# EAGLE board hurf1_board (EAGLE 8.2.2)
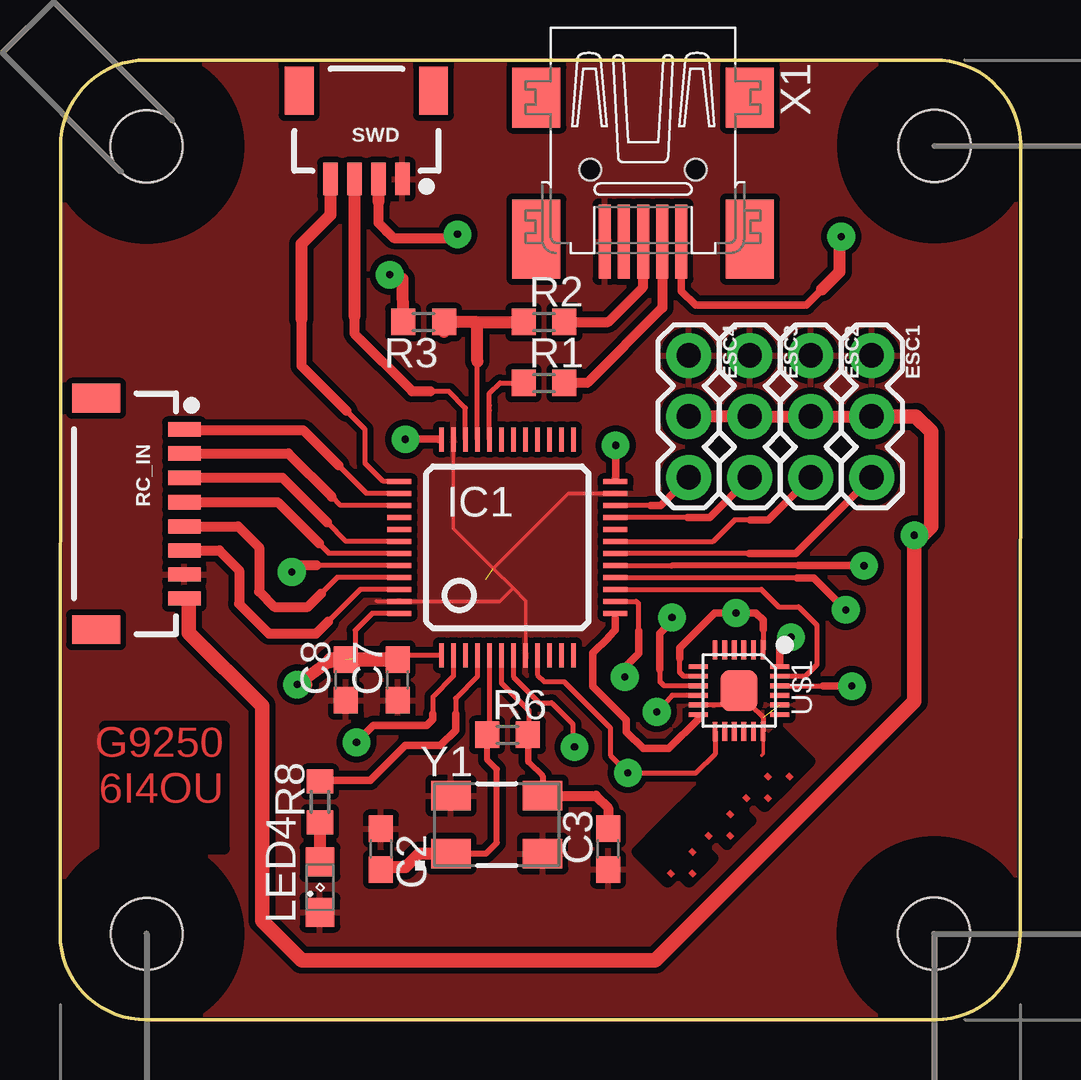
[diagram p0: board, top side]
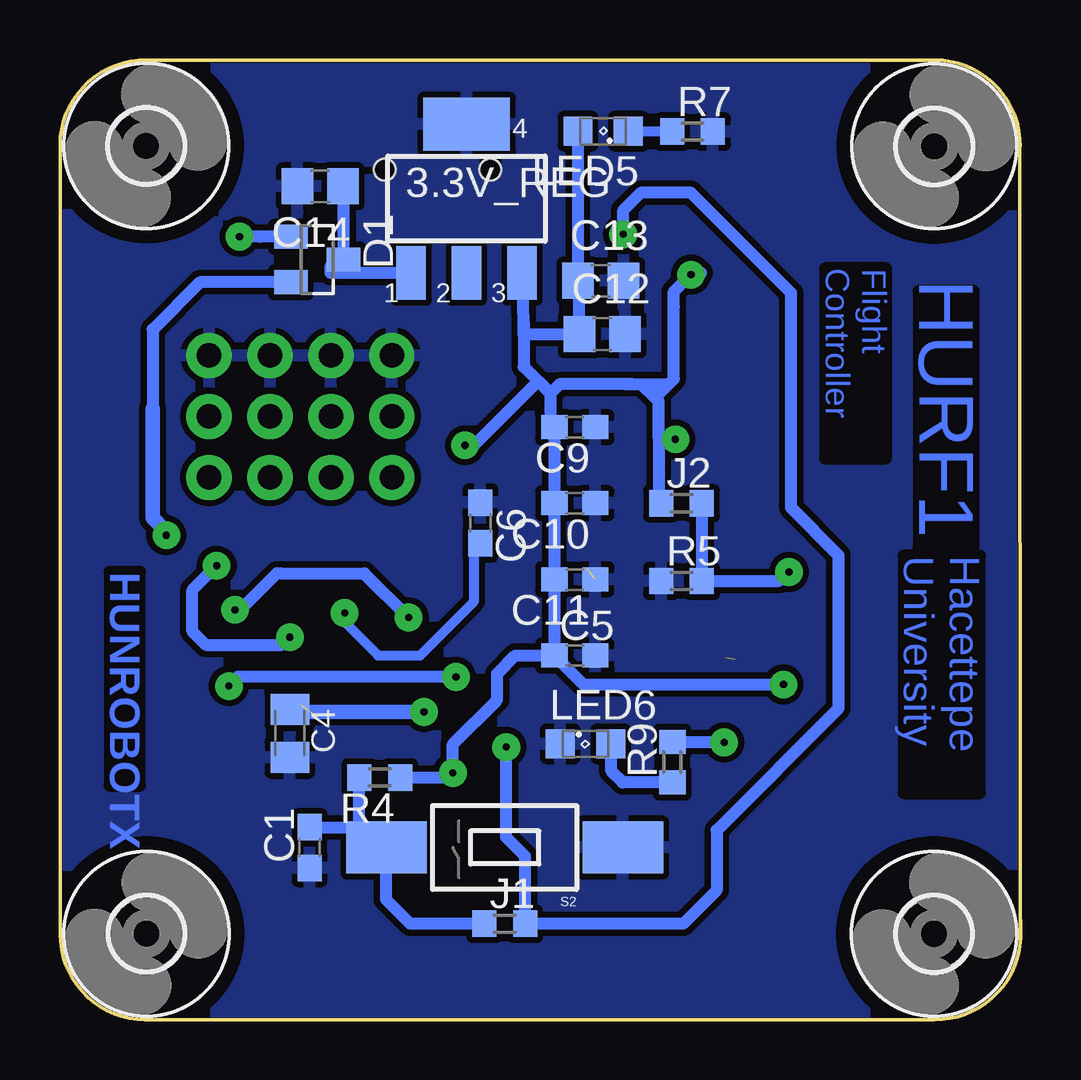
[diagram p1: board, bottom side, seen from below]

Size 40.03 x 40.01 mm. Coordinates in mm from the lower left corner, seen from the top.
Outline: 0.01,3.33 0.04,36.45
Outline: 40.01,3.46 40.03,36.64
Outline: 36.48,0 36.48,0.01 36.47,0.01
Outline: 36.47,0.01 3.61,0.01 arc-90 0,3.56
Outline: 0,3.38 0,4.15
Outline: 40.01,3.59 arc-90 36.47,0.01
Outline: 40.03,36.46 arc90 36.42,40.01 3.58,40.01 arc90 0.03,36.4
Copper layers (1*16): Top 0.035mm / dielectric 1.5mm / Bottom 0.035mm
Design rules "default *": minimum track width 6mil, minimum drill 0.35mm, track to track 10mil, track to pad 10mil, pad to pad 6mil, via to via 6mil, smd to smd 6mil, copper to edge 1mil, drill to drill 1mil, minimum pad ring 10mil, minimum via ring 8mil, stop-mask expansion 4mil, vias tented up to drill 0mil, thermal gap 10mil

## Footprints (pad centres in the part's own frame; a part is rotated, then mirrored left to right if it is on the bottom)
SOT223 = smd 1.219 x 2.235: 1 -2.311,-3.099; 2 0,-3.099; 3 2.311,-3.099 | smd 3.6 x 2.2: 4 0,3.099
C0603 = smd 1.1 x 1: 1 -0.85,0; 2 0.85,0
C0805K = smd 1.3 x 1.6: 1 -1,0; 2 1,0
C0805 = smd 1.3 x 1.5: 1 -0.95,0; 2 0.95,0
SOT23 = smd 1 x 1.4: 1 -0.95,-1.1; 2 0.95,-1.1; 3 0,1.1
1X03 = drill 1.016 pad 1.88: 1 0,0; 2 2.54,0; 3 5.08,0
3,0 = hole 3: 0,0
TQFP48 = smd 0.2 x 1: 1 -2.75,-4.5; 2 -2.25,-4.5; 3 -1.75,-4.5; 4 -1.25,-4.5; 5 -0.75,-4.5; 6 -0.25,-4.5; 7 0.25,-4.5; 8 0.75,-4.5; 9 1.25,-4.5; 10 1.75,-4.5; 11 2.25,-4.5; 12 2.75,-4.5; 25 2.75,4.5; 26 2.25,4.5; 27 1.75,4.5; 28 1.25,4.5; 29 0.75,4.5; 30 0.25,4.5; 31 -0.25,4.5; 32 -0.75,4.5; 33 -1.25,4.5; 34 -1.75,4.5; 35 -2.25,4.5; 36 -2.75,4.5 | smd 1 x 0.2: 13 4.5,-2.75; 14 4.5,-2.25; 15 4.5,-1.75; 16 4.5,-1.25; 17 4.5,-0.75; 18 4.5,-0.25; 19 4.5,0.25; 20 4.5,0.75; 21 4.5,1.25; 22 4.5,1.75; 23 4.5,2.25; 24 4.5,2.75; 37 -4.5,2.75; 38 -4.5,2.25; 39 -4.5,1.75; 40 -4.5,1.25; 41 -4.5,0.75; 42 -4.5,0.25; 43 -4.5,-0.25; 44 -4.5,-0.75; 45 -4.5,-1.25; 46 -4.5,-1.75; 47 -4.5,-2.25; 48 -4.5,-2.75
R0603 = smd 1 x 1.1: 1 -0.85,0; 2 0.85,0
SML0805 = smd 1.2 x 1.2: A 1.05,0; C -1.05,0
1X08_1MM_RA = smd 0.6 x 1.35: 1 -5.048,0; 2 -4.048,0; 3 -3.032,0; 4 -2.016,0; 5 -1,0; 6 0,0; 7 1,0; 8 2,0 | smd 1.2 x 2: NC1 3.3,-3.675; NC2 -6.348,-3.675
TL3302_GULL_WING = smd 3.35 x 2.16: 1 -4.925,0; 2 4.925,0
1X04_1MM_RA = smd 0.6 x 1.35: 1 -1.5,0; 2 -0.5,0; 3 0.5,0; 4 1.5,0 | smd 1.2 x 2: NC1 2.8,-3.675; NC2 -2.8,-3.675
LEAD-QFN24 = smd 0.8 x 0.2: 1 -1.7,1; 2 -1.7,0.6; 3 -1.7,0.2; 4 -1.7,-0.2; 5 -1.7,-0.6; 6 -1.7,-1; 13 1.7,-1; 14 1.7,-0.6; 15 1.7,-0.2; 16 1.7,0.2; 17 1.7,0.6; 18 1.7,1 | smd 0.2 x 0.8: 7 -1,-1.7; 8 -0.6,-1.7; 9 -0.2,-1.7; 10 0.2,-1.7; 11 0.6,-1.7; 12 1,-1.7; 19 1,1.7; 20 0.6,1.7; 21 0.2,1.7; 22 -0.2,1.7; 23 -0.6,1.7; 24 -1,1.7 | smd 1.7 x 1.54: 25 0,0
32005-201 = smd 3.1 x 0.5: 1 3,1.6; 2 3,0.8; 3 3,0; 4 3,-0.8; 5 3,-1.6 | smd 2.5 x 2: M1 -3,-4.45; M2 -3,4.45 | smd 3.3 x 2: M3 2.9,4.45; M4 2.9,-4.45 | hole 0.9: 0,2.2; 0,-2.2
GSX-531 = smd 1.64 x 1.24: 1 -1.91,-1.21; 2 1.91,-1.21; 3 1.91,1.21; 4 -1.91,1.21

## Placement (x,y rotation side)
3.3V_REG  LM340MP-05  [SOT223]  23.09,34.23 0 bottom
C1  100nF  [C0603]  29.63,7.18 90 bottom
C2  18pF  [C0603]  13.37,7.12 270 top
C3  18pF  [C0603]  22.83,7.12 90 top
C4  100nF  [C0805K]  30.45,11.94 270 bottom
C5  100nF  [C0603]  18.58,15.18 0 bottom
C6  10nF  [C0603]  22.52,20.71 270 bottom
C7  100nF  [C0603]  14.07,14.17 90 top
C8  100nF  [C0603]  11.91,14.17 90 top
C9  100nF  [C0603]  18.58,24.71 180 bottom
C10  10nF  [C0603]  18.58,21.53 180 bottom
C11  1nF  [C0603]  18.58,18.36 180 bottom
C12  10uF  [C0805]  17.44,28.58 0 bottom
C13  10uF  [C0805]  17.5,30.8 0 bottom
C14  10uF  [C0805]  29.18,34.74 180 bottom
D1  [SOT23]  29.31,31.69 270 bottom
ESC1  [1X03]  33.82,27.69 270 top
ESC2  [1X03]  31.28,27.69 270 top
ESC3  [1X03]  28.74,27.69 270 top
ESC4  [1X03]  26.2,27.69 270 top
H1  MOUNT-HOLE3.0  [3,0]  36.42,3.59 0 bottom
H2  MOUNT-HOLE3.0  [3,0]  36.44,36.43 0 bottom
H3  MOUNT-HOLE3.0  [3,0]  3.61,3.59 0 bottom
H4  MOUNT-HOLE3.0  [3,0]  3.6,36.41 0 bottom
IC1  STM32F10XCXT6  [TQFP48]  18.64,19.69 0 top
J1  0R  [R0603]  21.5,4.01 0 bottom
J2  0R  [R0603]  14.14,21.53 0 bottom
LED4  [SML0805]  10.83,5.53 90 top
LED5  [SML0805]  17.4,37.04 180 bottom
LED6  [SML0805]  18.14,11.5 0 bottom
R1  22R  [R0603]  20.17,26.55 0 top
R2  22R  [R0603]  20.17,29.09 0 top
R3  1K  [R0603]  15.15,29.09 180 top
R4  100K  [R0603]  26.71,10.1 180 bottom
R5  10K  [R0603]  14.14,18.29 0 bottom
R6  1M  [R0603]  18.64,11.88 0 top
R7  330R  [R0603]  13.68,37.03 0 bottom
R8  330R  [R0603]  10.83,9.09 90 top
R9  330R  [R0603]  14.52,10.74 90 bottom
RC_IN  [1X08_1MM_RA]  5.18,19.56 270 top
S2  [TL3302_GULL_WING]  21.5,7.18 180 bottom
SWD  swd  [1X04_1MM_RA]  12.76,35.05 180 top
U$1  MPU-9250  [LEAD-QFN24]  28.3,13.72 270 top
X1  MINI-USB-32005-201  [32005-201]  24.3,35.44 270 top
Y1  8MHz  [GSX-531]  18.2,8.13 0 top

## Library data of the parts
3.3V_REG = linear
C1-C3 C5-C14 J1 J2 R1-R9 = rcl
C4 = resistor
D1 = diode
ESC1-ESC4 RC_IN = SparkFun-Connectors
H1-H4 = holes
IC1 = stm32
LED4-LED6 = led
S2 = eswitch-tact
SWD = SparkFun-Connectors; PROD_ID: CONN-10310; SF_ID: PRT-10208
U$1 = invensense
X1 = con-cypressindustries; OC_FARNELL: unknown; OC_NEWARK: unknown
Y1 = Golledge; HEIGHT: 0.9

## Nets
3.3V: 3.3V_REG.3 C5.1 C7.2 C8.2 C9.2 C10.2 C11.2 C12.1 C13.1 IC1.1 IC1.9 IC1.24 IC1.36 IC1.48 J2.1 LED5.A R3.2 R4.1 U$1.13
BOOT: IC1.44 J2.2 R5.2
ESC1: ESC1.3 IC1.18
ESC2: ESC2.3 IC1.19
ESC3: ESC3.3 IC1.21
ESC4: ESC4.3 IC1.22
GND: 3.3V_REG.4 C1.1 C2.1 C3.1 C4.2 C5.2 C6.1 C7.1 C8.1 C9.1 C10.1 C11.1 C12.2 C13.2 C14.2 ESC1.1 ESC2.1 ESC3.1 ESC4.1 IC1.8 IC1.23 IC1.35 IC1.47 LED4.C LED6.C R5.1 R7.2 RC_IN.7 S2.1 SWD.1 U$1.11 U$1.18 U$1.20 X1.5 Y1.2 Y1.4
MPU_INT: IC1.13 U$1.12
N$1: R1.2 X1.2
N$2: R2.2 X1.3
N$3: C4.1 U$1.10
N$4: 3.3V_REG.1 C14.1 D1.3
N$5: C1.2 J1.1 R4.2 S2.2
N$6: LED6.A R9.1
N$7: LED5.C R7.1
N$8: LED4.A R8.1
NRST: IC1.7 J1.2 SWD.2
OSC_IN: C2.2 IC1.5 R6.1 Y1.1
OSC_OUT: C3.2 IC1.6 R6.2 Y1.3
RC_IN1: IC1.46 RC_IN.6
RC_IN2: IC1.45 RC_IN.5
RC_IN3: IC1.43 RC_IN.4
RC_IN4: IC1.42 RC_IN.3
RC_IN5: IC1.39 RC_IN.2
RC_IN6: IC1.38 RC_IN.1
SPI1_MISO: IC1.16 U$1.9
SPI1_MOSI: IC1.17 U$1.24
SPI1_NSS: IC1.14 U$1.22
SPI1_SCK: IC1.15 U$1.23
STATUS_LED1: IC1.2 R9.2
STATUS_LED2: IC1.4 R8.2
SWDCLK: IC1.37 SWD.4
SWDIO: IC1.34 SWD.3
UNREG_5V: D1.2 ESC1.2 ESC2.2 ESC3.2 ESC4.2 RC_IN.8
USB_DM: IC1.32 R1.1
USB_DP: IC1.33 R2.1 R3.1
USB_ID: X1.4
USB_UNREG: D1.1 X1.1
VDDIO: C6.2 U$1.1 U$1.8

## Tracks (layer width: path | path; a pad name or v marks a point on that pad's centre or on a via)
3.3V  (via drill 0.3 pad 1.15)  (1 unrouted)
  Top 0.203: U$1.13 27.3,11.07 26.52,10.29 23.7,10.29 | 23.7,10.29 v23.66,10.29 22.93,11.02 22.93,12.17 20.99,14.1 20.17,14.1 19.89,14.38 IC1.9 | 23.66,10.33 23.7,10.29 | 15.79,24.19 IC1.36 | IC1.48 13,16.94 12.29,16.23 12.29,15.08 | IC1.24 23.14,22.57 23.14,24.26 | IC1.1 14.25,15.19 C7.2
  Top 0.305: v14.39,24.2 15.78,24.2 15.79,24.19 | v23.15,23.95 23.15,22.58 23.14,22.57
  Top 0.508: R3.2 14.28,30.88 v13.74,31.06 | 11.24,14.95 v9.88,13.98 10.27,13.96
  Top 0.61: C7.2 C8.2 11.3,15.02 11.24,14.95
  Bottom 0.305: C9.2 C10.2 C11.2 C5.1
  Bottom 0.406: v23.66,10.3 v23.66,10.29
  Bottom 0.508: C5.1 C9.2 19.6,24.72 19.6,26.1 | 15.23,25.93 15.79,26.49 16.17,26.49 | 15.23,25.93 15.09,25.78 15.09,24.28 | 16.47,26.5 16.17,26.49 | C5.1 18.22,13.98 v9.88,13.98 | 15.09,24.28 15.09,21.63 J2.1 | v14.39,24.2 15,24.2 15.09,24.28 | 14.45,29.73 14.45,26.71 14.67,26.49 | 16.17,26.49 19.21,26.49 19.6,26.1 | 20.71,29.09 3.3V_REG.3 | 20.71,29.09 20.71,27.22 20.11,26.62 | 20.11,26.62 19.6,26.1 | 20.71,29.09 20.71,28.58 C12.1 18.39,30.74 C13.1 LED5.A | v23.15,23.95 22.78,23.95 20.11,26.62 | R4.1 23.85,10.1 v23.66,10.3 | v23.66,10.29 23.66,11.5 21.82,13.34 21.82,14.42 21.06,15.18 C5.1 | 13.35,31.1 13.32,31.15 v13.74,31.06 14.45,30.35 14.45,29.73 | 16.17,26.49 14.67,26.49 | 15.23,25.93 14.67,26.49 | 14.46,29.53 14.45,29.73
BOOT  (via drill 0.3 pad 1.15)
  Top 0.203: IC1.44 10.69,18.94
  Top 0.406: v9.66,18.67 9.7,18.94 10.69,18.94
  Bottom 0.508: J2.2 R5.2 10.07,18.29 v9.66,18.67
ESC1
  Top 0.203: 28.72,19.44 IC1.18
  Top 0.305: ESC1.3 30.65,19.44 28.72,19.44
ESC2
  Top 0.203: IC1.19 27.21,19.94 28.1,20.83 28.76,20.83
  Top 0.305: ESC2.3 29.5,20.83 28.76,20.83
ESC3
  Top 0.203: 26.15,20.94 IC1.21
  Top 0.305: ESC3.3 27.07,20.94 26.15,20.94
ESC4
  Top 0.203: 24.61,21.44 IC1.22
  Top 0.305: ESC4.3 25.03,21.44 24.61,21.44
GND  (2 unrouted)
  Top 0.152: IC1.35 16.39,20.48 18.06,18.82 | 18.88,18 18.06,18.82 | 18.88,18 19.41,17.47 19.41,15.2 IC1.8 | 13.18,17.47 13.21,17.44 IC1.47 18.32,17.44 18.88,18 | IC1.23 21.18,21.94 18.06,18.82 | U$1.18 29.3,11.09 29.24,11.03
  Top 0.203: U$1.18 29.3,12.6 28.77,13.13 26.65,13.13 U$1.11
  pour Top: -13.11,-10.79 -13.11,50.17 -11.84,51.44 50.39,51.44 52.93,48.9 52.93,-9.52 51.66,-10.79 -11.84,-10.79
  pour Bottom: -12.34,50.68 48.11,50.68 50.9,47.89 50.9,-5.45 44.04,-12.31 -5.23,-12.31 -13.36,-4.18 -13.36,49.66
  pour Top (no thermals): 16.1,22.68 15.72,22.29 15.72,17.09 16.1,16.71 21.31,16.71 21.69,17.09 21.69,22.29 21.31,22.68
MPU_INT
  Top 0.203: IC1.13 23.14,16.75 | 26.58,12.71 U$1.12 26.6,12.61
  Top 0.305: 26.6,12.61 26.6,12.53 25.37,11.31 24.3,11.31 23.6,12.01 23.6,12.5 22.2,13.9 22.2,15.29 22.84,15.93 22.84,15.95 23.14,16.25 23.14,16.75
N$1
  Top 0.406: R1.2 21.96,26.55 25.1,29.68 X1.2
N$2
  Top 0.406: X1.3 24.3,30.55 22.83,29.09 R2.2
N$3  (via drill 0.3 pad 1.15)
  Top 0.203: U$1.10 25.5,13.53 v24.87,12.83
  Bottom 0.61: v24.87,12.83 30.34,12.83 C4.1
N$4
  Bottom 0.508: 3.3V_REG.1 28.75,31.13 28.74,31.44 28.17,31.27 D1.3 28.21,34 C14.1
N$5
  Bottom 0.508: J1.1 25.44,4.01 26.45,5.02 26.45,7.15 | 26.45,7.15 S2.2 | 27.56,8.04 R4.2 | 27.56,8.04 27.56,7.35 27.6,7.31 26.61,7.31 26.45,7.15 | C1.2 27.57,8.03 27.56,8.04
N$6
  Bottom 0.508: R9.1 16.59,9.89 17.06,10.36 17.06,11.47 LED6.A
N$7
  Bottom 0.406: LED5.C 14.54,37.04 R7.1
N$8
  Top 0.508: R8.1 LED4.A
N$20
  Bottom 0.001: 19.61,20.56 19.59,20.59 19.57,20.57
N$21
  Bottom 0.001: 19.67,20.63 19.66,20.65 19.63,20.63 19.61,20.61 19.65,20.56
N$23
  Bottom 0.001: 19.38,20.92 19.45,20.96 19.43,20.99
N$24
  Bottom 0.001: 19.5,20.8 19.49,20.79
NRST  (via drill 0.3 pad 1.15)
  Top 0.203: IC1.7 18.89,14.3 19.98,13.21 20.48,13.21 21.37,12.33 21.37,11.44 v21.44,11.37
  Top 0.406: 13.26,34.12 13.26,33.23 13.61,32.88 13.62,32.88 13.9,32.59 16.41,32.59 v16.56,32.75
  Top 0.508: SWD.2 13.26,34.12
  Bottom 0.508: v21.44,11.37 21.44,7.61 20.65,6.82 J1.2 14.07,4.01 12.67,5.4 12.67,7.9 7.59,12.98 7.59,19.37 9.57,21.35 9.57,30.3 13.74,34.47 15.83,34.47 16.56,33.75 v16.56,32.75
OSC_IN
  Top 0.152: 17.89,12.08 IC1.5 | 17.89,12.08 17.89,11.92 17.89,11.76 17.89,11.64 R6.1 | 17.82,12.01 17.89,12.08
  Top 0.203: R6.1 17.79,10.84 | IC1.5 17.89,11.76
  Top 0.254: 17.89,11.92 17.79,11.82 17.79,10.84 18.2,10.44 18.2,7.38 17.74,6.92 Y1.1 16.27,7.09
  Top 0.508: Y1.1 14.96,6.92 14.39,6.36 13.46,6.36 C2.2
OSC_OUT
  Top 0.152: 19.53,12.9 19.53,11.91 19.53,11.87 19.53,11.5 R6.2
  Top 0.203: 19.53,11.91 19.53,11.87 | 19.53,11.87 19.53,10.74 | IC1.6 18.39,14.04 19.53,12.9 19.53,11.87
  Top 0.254: R6.2 19.49,10.78 19.53,10.74 20.11,10.16 Y1.3
  Top 0.406: Y1.3 22.32,9.34 22.83,8.83 C3.2
RC_IN1
  Top 0.203: IC1.46 12.51,17.94 11.16,16.59
  Top 0.406: 11.16,16.59 10.66,16.09 8.72,16.09 7.47,17.34 7.47,18.74 6.64,19.56 RC_IN.6
RC_IN2
  Top 0.2: IC1.45 11.55,18.44 11.28,18.17
  Top 0.203: 11.28,18.17 10.88,17.77
  Top 0.406: RC_IN.5 7.42,20.56 8.29,19.69 8.29,17.85 8.93,17.21 10.32,17.21 10.88,17.77
RC_IN3
  Top 0.2: IC1.43 11.21,19.44 10.8,19.86
  Top 0.406: RC_IN.4 9.07,21.58 10.8,19.86
RC_IN4
  Top 0.2: IC1.42 11.92,19.94 11.12,20.74
  Top 0.406: RC_IN.3 9.26,22.6 11.12,20.74
RC_IN5
  Top 0.2: IC1.39 11.69,21.44 11.32,21.81
  Top 0.406: RC_IN.2 9.52,23.61 11.32,21.81
RC_IN6
  Top 0.2: IC1.38 12.77,21.94 11.6,23.12
  Top 0.406: RC_IN.1 5.21,24.58 10.13,24.58 11.6,23.12
SPI1_MISO  (via drill 0.3 pad 1.15)
  Top 0.203: 24.99,14.6 24.99,14.1 25.17,13.92 U$1.9 | IC1.16 30.69,18.44 30.71,18.42
  Top 0.305: 30.71,18.42 31.41,18.42 v32.74,17.09 | v25.5,16.77 25.5,16.61 24.99,16.1 24.99,14.6
  Bottom 0.305: 30.99,18.61 30.84,18.61
  Bottom 0.508: v32.74,17.09 32.52,17.09 30.99,18.61 | 30.84,18.61 27.34,18.61 v25.5,16.77
SPI1_MOSI  (via drill 0.3 pad 1.15)
  Top 0.203: 30,14.83 U$1.24 | IC1.17 25.47,18.94 25.49,18.93
  Top 0.254: 30.76,18.93 25.49,18.93
  Top 0.305: v30.45,15.94 30,15.49 30,14.83 | v33.5,18.93 30.76,18.93
  Bottom 0.508: v33.5,18.93 34.52,17.91 34.52,16.2 33.95,15.63 30.77,15.63 v30.45,15.94
SPI1_NSS  (via drill 0.3 pad 1.15)
  Top 0.203: U$1.22 31.8,13.92 | IC1.14 24.01,17.44 24.1,17.34 24.1,16.21
  Top 0.305: v23.53,14.29 23.53,14.7 24.1,15.27 24.1,16.21 | 31.8,13.92 v32.98,13.92 v32.99,13.91
  Bottom 0.508: v23.53,14.29 32.61,14.29 v32.99,13.91
SPI1_SCK
  Top 0.152: 31.07,14.34 31.05,14.32
  Top 0.203: IC1.15 29.22,17.94 29.95,17.21 30.77,17.21 31.53,16.45 31.53,14.8 31.07,14.34 | 31.05,14.32 U$1.23
STATUS_LED1  (via drill 0.3 pad 1.15)
  Top 0.203: IC1.2 16.39,14.33 15.53,13.47 15.53,12.76
  Top 0.305: 15.53,12.76 15.53,12.52 15.28,12.26 13.06,12.26 v12.36,11.56
  Bottom 0.508: R9.2 12.38,11.59 v12.36,11.56
STATUS_LED2
  Top 0.203: IC1.4 17.39,14.31 16.48,13.4 16.48,12.76
  Top 0.305: 16.48,12.76 16.48,12.07 15.85,11.44 14.39,11.44 12.93,9.98 10.87,9.98 R8.2
SWDCLK
  Top 0.203: IC1.37 13.47,22.44 12.7,23.21 12.7,24.63 11.95,25.38
  Top 0.406: 10.06,29.22 10.06,27.27 11.95,25.38
  Top 0.508: SWD.4 11.26,33.55 10.06,32.34 10.06,29.22
SWDIO
  Top 0.203: IC1.34 16.89,25.51 16.2,26.2 15.44,26.2
  Top 0.406: 12.26,29.34 12.26,28.61 14.67,26.2 15.44,26.2
  Top 0.508: SWD.3 12.26,29.34
UNREG_5V  (via drill 0.3 pad 1.15)
  Top 0.508: ESC4.2 ESC3.2 ESC2.2 ESC1.2
  Top 0.61: 35.6,19.87 v35.6,20.2 | 35.6,19.87 35.6,13.28 24.8,2.48 10.07,2.48 8.42,4.13 8.42,13.09 5.37,16.14 5.37,17.37 RC_IN.8 | ESC1.2 35.66,25.15 36.3,24.52 36.3,20.57 35.6,19.87
  Bottom 0.508: 36.17,25.47 36.17,28.77 34.2,30.74 D1.2
  Bottom 0.61: v35.6,20.2 35.6,20.34 36.17,20.91 36.17,25.47
USB_DM
  Top 0.203: IC1.32 17.89,25.41 | 17.89,25.41 17.89,25.61 | 17.89,25.41 17.89,26.12 18.33,26.55 R1.1
USB_DP
  Top 0.203: IC1.33 17.39,27.45
  Top 0.508: 16,28.68 R3.1 17.34,29.09 | 17.34,29.09 R2.1 | 17.39,27.45 17.39,29.04 17.34,29.09
USB_UNREG  (via drill 0.3 pad 1.15)
  Top 0.305: X1.1 25.9,30.37 26.48,29.78 31.09,29.78 31.75,30.45
  Top 0.508: 31.75,30.45 32.49,31.18 32.49,32.58 v32.55,32.65
  Bottom 0.508: D1.1 31.73,32.64 v32.55,32.65
VDDIO  (via drill 0.3 pad 1.15)
  Top 0.152: 26.57,14.29 U$1.8
  Top 0.203: U$1.8 25.98,14.32 25.82,14.48 25.82,15.06 | 29.3,15.83 U$1.1 29.3,16.27
  Top 0.305: 25.82,15.06 25.82,15.5 27.28,16.96 v28.17,16.96 28.99,16.96 29.3,16.66 29.3,16.27
  Bottom 0.152: 22.77,17.44 22.77,18.61 22.83,18.68
  Bottom 0.305: 22.77,19.64 C6.2
  Bottom 0.406: v28.17,16.96 28.17,16.58 26.77,15.18 25.03,15.18 22.77,17.44 22.77,19.64

## Text on the board
Top: G9250 / 6I4OU | . | . | . | . | . | . | . | . | . | .
Bottom: Flight / Controller | HURF1 | Hacettepe / University | HUNROBOTX